# Allegro board 2019-09-02.brd
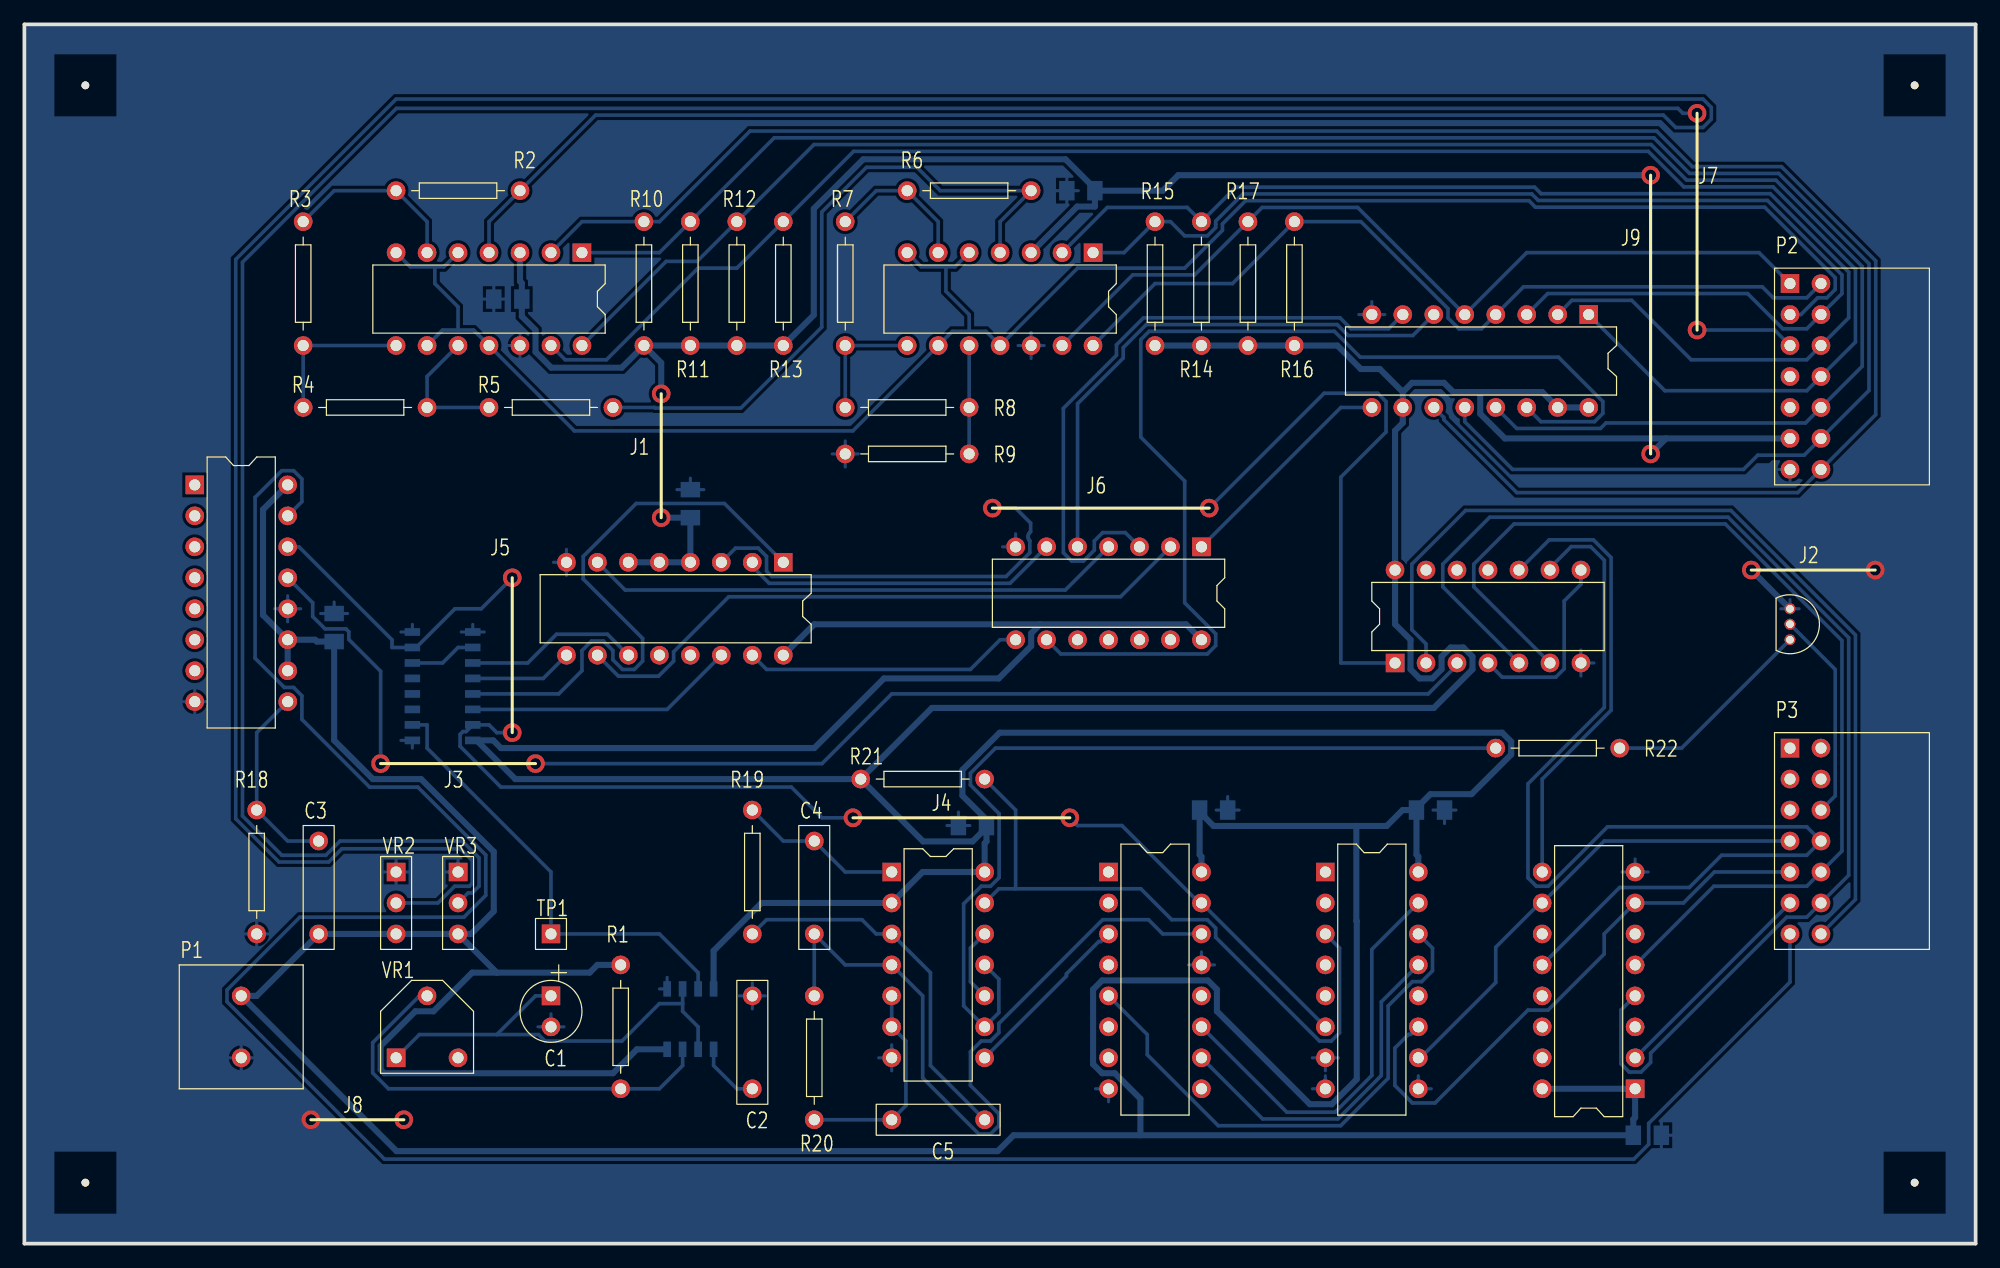
[diagram p0: board, top side]
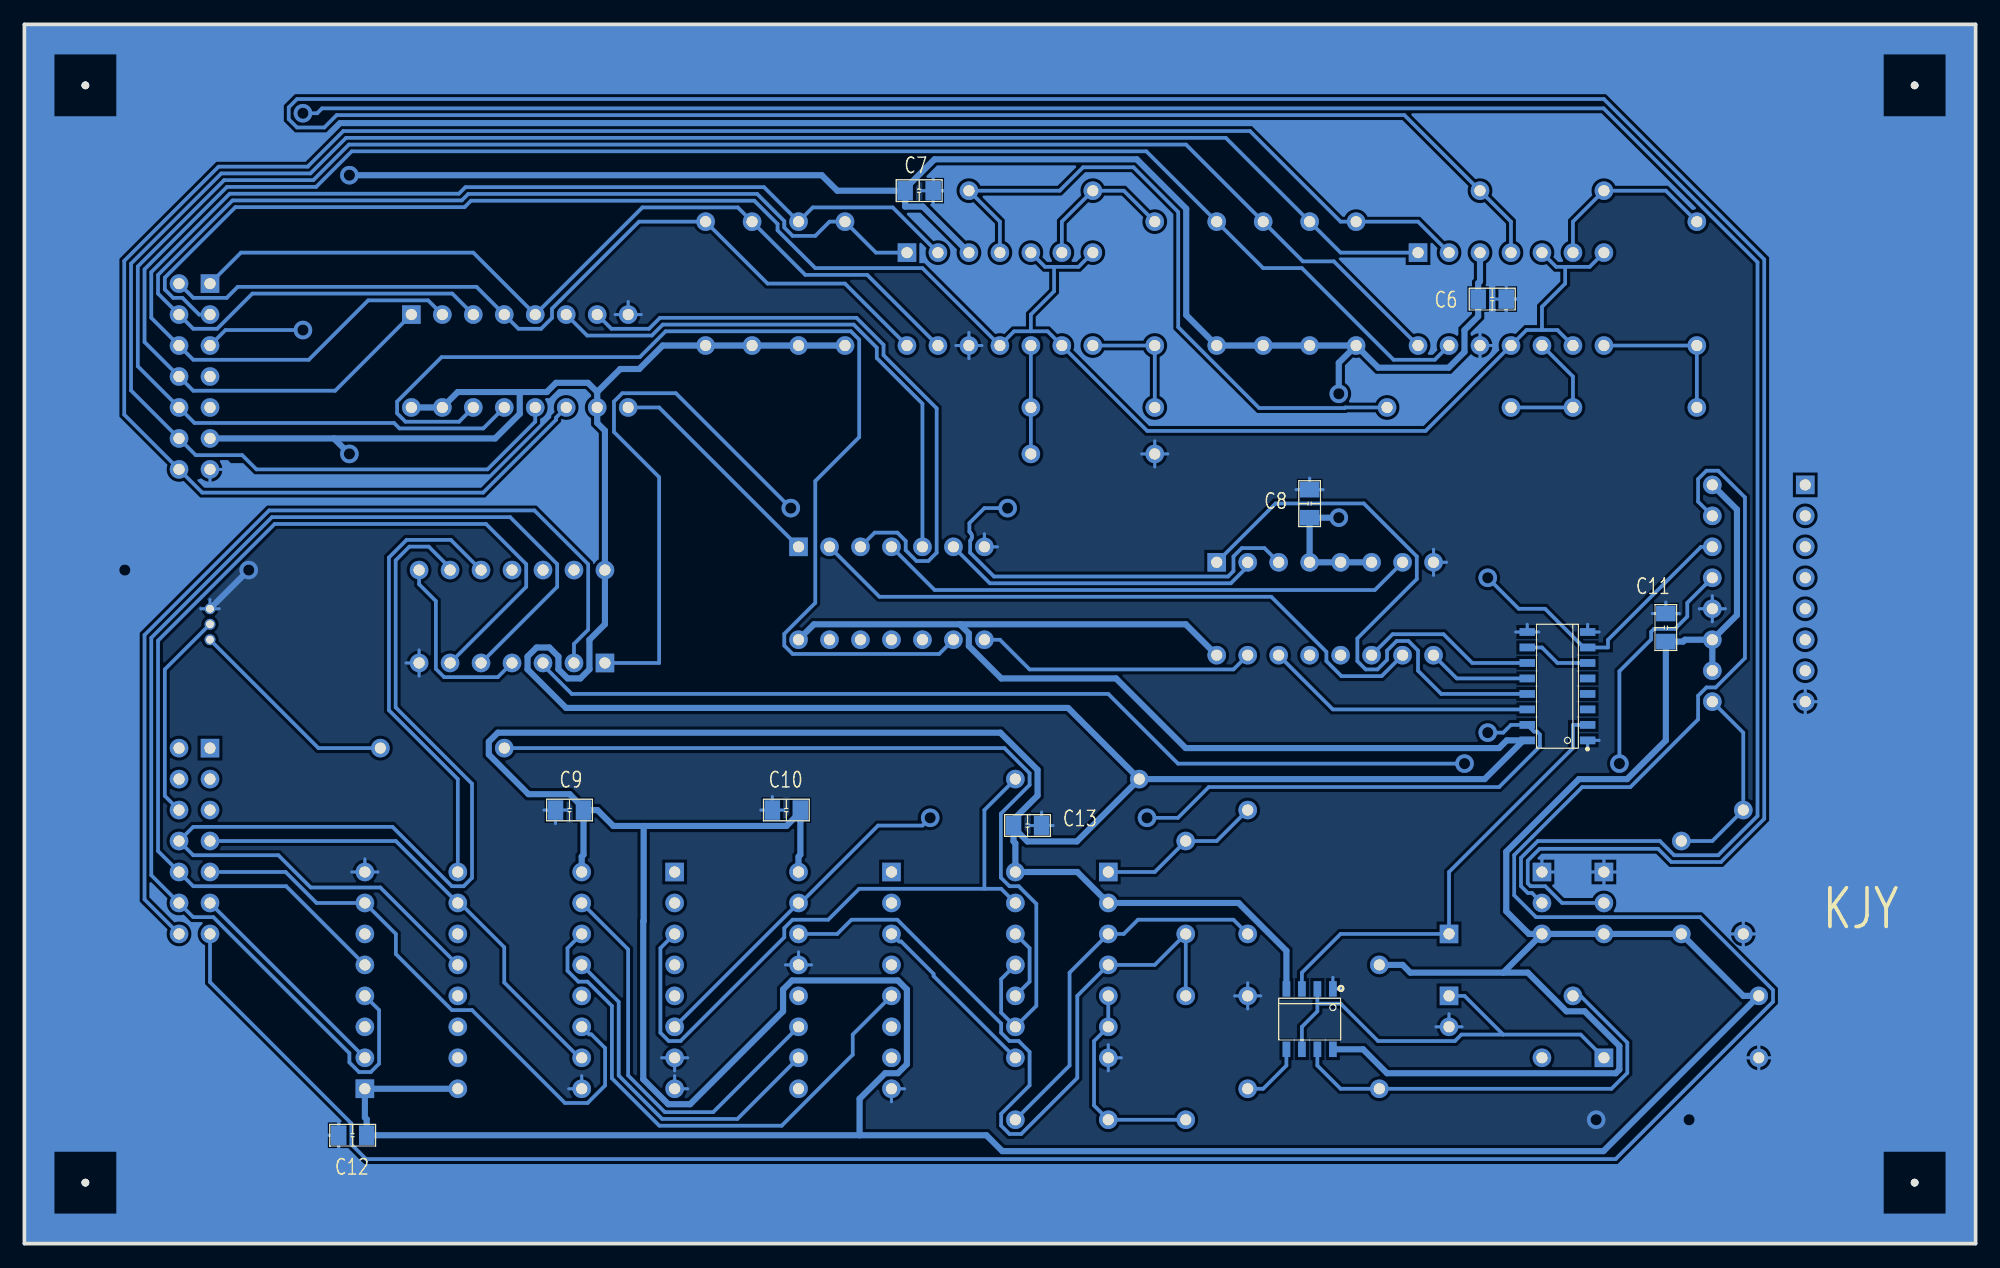
[diagram p1: board, bottom side, seen from below]

Outline 160 x 100 mm; copper layers: TOP, BOTTOM. Coordinates in mm from the lower left corner of the outline.
Outline path: 0,100 0,0 160,0 160,100 0,100

## Design rules (mm)
nets with their own width: min track width 0.5; nets +5V GND

## Placement (name value [footprint] x y rotation side)
C1  10uF  [CAP196]  43.18 20.32 180 top
C2  0.1uF  [CAP300]  59.69 12.7 90 top
C3  0.1uF  [CAP300]  24.13 25.4 90 top
C4  0.1uF  [CAP300]  64.77 33.02 270 top
C5  0.1uF  [CAP300]  78.74 10.16 180 top
C6  0.1uF  [SMDCAP]  40.64 77.47 180 bottom
C7  0.1uF  [SMDCAP]  87.63 86.36 180 bottom
C8  0.1uF  [SMDCAP]  54.61 59.69 90 bottom
C9  0.1uF  [SMDCAP]  114.3 35.56 0 bottom
C10  0.1uF  [SMDCAP]  96.52 35.56 0 bottom
C11  0.1uF  [SMDCAP]  25.4 49.53 90 bottom
C12  0.1uF  [SMDCAP]  132.08 8.89 0 bottom
C13  0.1uF  [SMDCAP]  78.74 34.29 180 bottom
J1  -  [3]  52.22 59.54 270 bottom
J2  -  [3]  141.6 55.24 180 bottom
J3  -  [4]  41.91 39.37 0 bottom
J4  -  [6]  85.72 34.92 0 bottom
J5  -  [4]  40.01 41.91 270 bottom
J6  -  [6]  97.16 60.33 0 bottom
J7  -  [6]  137.16 92.71 90 bottom
J8  -  [2]  31.11 10.16 0 bottom
J9  -  [8]  133.35 87.63 90 bottom
NOREF  -  [unnamed]  155 5 0 top
NOREF#2  -  [unnamed]  155 95 0 top
NOREF#3  -  [unnamed]  5 5 0 top
NOREF#4  -  [unnamed]  5 95 0 top
P1  CON2  [2P]  17.78 20.32 0 top
P2  CON14  [JUMPER14]  144.78 78.74 270 top
P3  CON14  [JUMPER14]  144.78 40.64 270 top
Q1  2SC1815  [TO92]  144.78 52.07 0 top
R1  10K  [RES400]  48.9 22.86 270 top
R2  10K  [RES400]  40.64 86.36 180 top
R3  10K  [RES400]  22.86 83.82 270 top
R4  10K  [RES400]  22.86 68.58 0 top
R5  10K  [RES400]  38.1 68.58 0 top
R6  10K  [RES400]  82.55 86.36 180 top
R7  10K  [RES400]  67.31 83.82 270 top
R8  10K  [RES400]  67.31 68.58 0 top
R9  10K  [RES400]  77.47 64.77 180 top
R10  10K  [RES400]  50.8 73.66 90 top
R11  10K  [RES400]  54.61 73.66 90 top
R12  10K  [RES400]  58.42 73.66 90 top
R13  10K  [RES400]  62.23 73.66 90 top
R14  10K  [RES400]  96.52 73.66 90 top
R15  10K  [RES400]  92.71 73.66 90 top
R16  10K  [RES400]  104.14 73.66 90 top
R17  10K  [RES400]  100.33 73.66 90 top
R18  10K  [RES400]  19.05 35.56 270 top
R19  10K  [RES400]  59.69 35.56 270 top
R20  10K  [RES400]  64.77 20.32 270 top
R21  10K  [RES400]  68.58 38.1 0 top
R22  10K  [RES400]  130.81 40.64 180 top
TP1  TP  [JUMPER1]  43.18 25.4 0 top
U1  NE555  [SOIC8]  54.61 18.41 270 bottom
U2  LM339  [DIP14_3]  45.72 81.28 270 top
U3  LM339  [DIP14_3]  87.63 81.28 270 top
U4  40147  [DIP16_3]  128.27 76.2 270 top
U5  4069  [DIP14_3]  96.52 57.15 270 top
U6  4518  [SOIC16]  34.29 45.72 0 bottom
U7  4585  [DIP16_3]  62.23 55.88 270 top
U8  4027  [DIP16_3]  13.97 62.23 0 top
U9  4071  [DIP14_3]  112.39 47.62 90 top
U10  4001  [DIP14_3]  71.12 30.48 0 top
U11  4017  [DIP16_3]  88.9 30.48 0 top
U12  4051  [DIP16_3]  106.68 30.48 0 top
U13  4175  [DIP16_3]  132.08 12.7 180 top
VR1  1M  [VR1]  30.48 15.24 0 top
VR2  10K  [VR2]  30.48 27.94 0 top
VR3  10K  [VR2]  35.56 27.94 0 top

## Library data of the parts
C1 = Cap POL
C2-C5 = Cap NP
C6-C13 = Cap TEXT
J1-J9 = JUMPER
P1 = CON2
P2 P3 = CON14
Q1 = 2SC1815
R1-R22 = resistor
TP1 = TP
U1 = NE555: Tolerance: ***; User Part Number: ***
U2 U3 = LM339: Tolerance: ***; User Part Number: ***
U4 = 40147: Tolerance: ***; User Part Number: ***
U5 = 4069: Tolerance: ***; User Part Number: ***
U6 = 4518: Tolerance: ***; User Part Number: ***
U7 = 4585: Tolerance: ***; User Part Number: ***
U8 = 4027: Tolerance: ***; User Part Number: ***
U9 = 4071: Tolerance: ***; User Part Number: ***
U10 = 4001: Tolerance: ***; User Part Number: ***
U11 = 4017: Tolerance: ***; User Part Number: ***
U12 = 4051: Tolerance: ***; User Part Number: ***
U13 = 4175: Tolerance: ***; User Part Number: ***
VR1 = VR1
VR2 VR3 = VR2

## Footprints (pads in the part's own frame, mm; a bottom-side part is the same pattern mirrored in y, then rotated)
2P
  round 1.524 hole 0.914: 1(0,0) 2(0,-5.08)
CAP196
  rect 1.524x1.524 hole 0.914: 1(0,0)
  round 1.524 hole 0.914: 2(0,2.54)
CAP300
  round 1.524 hole 0.914: 1(0,0) 2(7.62,0)
DIP14_3
  rect 1.524x1.524 hole 0.914: 1(0,0)
  round 1.524 hole 0.914: 2(0,-2.54) 3(0,-5.08) 4(0,-7.62) 5(0,-10.16) 6(0,-12.7) 7(0,-15.24) 8(7.62,-15.24) 9(7.62,-12.7) 10(7.62,-10.16) 11(7.62,-7.62) 12(7.62,-5.08) 13(7.62,-2.54) 14(7.62,0)
DIP16_3
  rect 1.524x1.524 hole 0.914: 1(0,0)
  round 1.524 hole 0.914: 2(0,-2.54) 3(0,-5.08) 4(0,-7.62) 5(0,-10.16) 6(0,-12.7) 7(0,-15.24) 8(0,-17.78) 9(7.62,-17.78) 10(7.62,-15.24) 11(7.62,-12.7) 12(7.62,-10.16) 13(7.62,-7.62) 14(7.62,-5.08) 15(7.62,-2.54) 16(7.62,0)
JUMPER1
  rect 1.524x1.524 hole 0.914: 1(0,0)
JUMPER14
  rect 1.524x1.524 hole 0.914: 1(0,0)
  round 1.524 hole 0.914: 2(0,2.54) 3(2.54,0) 4(2.54,2.54) 5(5.08,0) 6(5.08,2.54) 7(7.62,0) 8(7.62,2.54) 9(10.16,0) 10(10.16,2.54) 11(12.7,0) 12(12.7,2.54) 13(15.24,0) 14(15.24,2.54)
RES400
  round 1.524 hole 0.914: 1(0,0) 2(10.16,0)
SMDCAP
  rect 1.27x1.6 smd: 1(-0.15,0) 2(2.15,0)
SOIC8
  rect 1.27x0.635 smd: 1(-2.476,1.905) 2(-2.476,0.635) 3(-2.476,-0.635) 4(-2.476,-1.905) 5(2.476,-1.905) 6(2.476,-0.635) 7(2.476,0.635) 8(2.476,1.905)
SOIC16
  rect 1.27x0.635 smd: 1(-2.476,4.445) 2(-2.476,3.175) 3(-2.476,1.905) 4(-2.476,0.635) 5(-2.476,-0.635) 6(-2.476,-1.905) 7(-2.476,-3.175) 8(-2.476,-4.445) 9(2.476,-4.445) 10(2.476,-3.175) 11(2.476,-1.905) 12(2.476,-0.635) 13(2.476,0.635) 14(2.476,1.905) 15(2.476,3.175) 16(2.476,4.445)
TO92
  round 0.889 hole 0.635: 1(0,0) 2(0,-1.27) 3(0,-2.54)
unnamed
  round 0.635 hole 3 unplated: (0,0)
VR1
  rect 1.524x1.524 hole 0.914: 1(0,0)
  round 1.524 hole 0.914: 2(2.54,5.08) 3(5.08,0)
VR2
  round 1.524 hole 0.914: 1(0,-2.54) 2(0,0)
  rect 1.524x1.524 hole 0.914: 3(0,2.54)

## Nets
+5V: C3.1 C6.1 C7.1 C8.1 C9.1 C10.1 C11.1 C12.1 C13.1 P1.1 P2.11 R1.1 R10.1 R11.1 R12.1 R13.1 R14.1 R15.1 R16.1 R17.1 R21.1 U1.4(RST) U1.8(VCC) U2.3 U3.3 U4.10(I\9\) U4.15(I\0\) U4.16(VCC) U5.14 U6.16 U7.4(A>BIN) U7.5(A<BIN) U7.6(A=BIN) U7.16(VCC) U8.10(J) U8.11(K) U8.16 U9.14 U10.2(I1) U10.14 U11.16(VCC) U12.16(VCC) U13.1(R\S\T\) U13.16(VCC) VR2.1(A) VR3.1(A)
GND: C1.2 C2.2 C6.2 C7.2 C8.2 C9.2 C10.2 C11.2 C12.2 C13.2 P1.2 P2.13 Q1.1(B) R9.2 R18.2 U1.1(GND) U2.12 U3.12 U4.8(GND) U5.7 U6.1(CLK) U6.8 U6.9(CLK) U7.8(GND) U8.8 U8.12(RST) U9.7 U10.7 U11.8(GND) U11.13(C\K\E\N\) U12.7(VEE) U12.8(GND) U12.9(C) U13.8(GND) VR2.3(WIPER) VR3.3(WIPER)
AD0: P2.14 R10.2 U2.2(OUT) U4.11(I\1\)
AD1: P2.12 R11.2 U2.1(OUT) U4.12(I\2\)
AD2: P2.10 R12.2 U2.14(OUT) U4.13(I\3\)
AD3: P2.8 R13.2 U2.13(OUT) U4.1(I\4\)
AD4: P2.6 R14.2 U3.2(OUT) U4.2(I\5\)
AD5: P2.4 R15.2 U3.1(OUT) U4.3(I\6\)
AD6: P2.2 R16.2 U3.14(OUT) U4.4(I\7\)
AD7: P2.1 R17.2 U3.13(OUT) U4.5(I\8\)
CLK: TP1.1 U1.3(OUT) U6.2(EN)
MOTOR-GND: P3.6 Q1.2(C)
MR: U6.7(CLR) U6.15(CLR) U8.14(Q\) U11.15(RST) U12.6(E\N\)
MR2: P3.13 U8.15(Q)
SW1: P3.14 U9.2(I1)
SW2: P3.12 U9.5(I0) U13.4(D0)
SW3: P3.10 U9.6(I1) U13.5(D1)
SW4: P3.8 U9.9(I1) U13.12(D2)
SWLED1: P3.11 U13.2(Q0)
SWLED2: P3.9 U12.11(A) U13.7(Q1)
SWLED3: P3.7 U12.10(B) U13.10(Q2)
VR3: P2.5 VR3.2(B)
VR-LED: P2.3 U2.5(+IN) U2.7(+IN) U2.9(+IN) U2.11(+IN) U3.5(+IN) U3.7(+IN) U3.9(+IN) U3.11(+IN)
N02154: R2.2 R3.1 U2.6(-IN)
N02158: R2.1 U2.4(-IN) VR2.2(B)
N02195: R3.2 R4.1 U2.8(-IN)
N02258: R4.2 R5.1 U2.10(-IN)
N02321: R5.2 R6.1 U3.4(-IN)
N02384: R6.2 R7.1 U3.6(-IN)
N02447: R7.2 R8.1 U3.8(-IN)
N02510: R8.2 R9.1 U3.10(-IN)
N03272: U4.9(A\) U5.1(I)
N03276: U4.7(B\) U5.3(I)
N03288: U4.6(C\) U5.5(I)
N03300: U4.14(D\) U5.9(I)
N03312: U5.8(O) U7.15(A3)
N03319: U5.6(O) U7.2(A2)
N03331: U5.4(O) U7.7(A1)
N03346: U5.2(O) U7.10(A0)
N03382: U6.11(Q0) U7.11(B0)
N03384: U6.12(Q1) U7.9(B1)
N03386: U6.13(Q2) U7.1(B2)
N03388: U6.14(Q3) U7.14(B3)
N03412: U6.6(Q3) U6.10(EN)
N05589: U7.3(A=BOUT) U9.1(I0)
N05720: R1.2 U1.7(DISC) VR1.2
N05724: C1.1 U1.2(TRIG) U1.6(THR) VR1.1
N05765: C2.1 U1.5(CV)
N05780: U8.13(CLK) U9.3(O)
N05813: C3.2 R18.1 U8.9(SET)
N09092: Q1.3(E) R22.1
N09137: C5.1 R19.2 U10.3(O)
N09147: C5.2 R20.2 U10.5(I0) U10.6(I1)
N09232: C4.1 R19.1 U10.1(I0)
N09296: C4.2 R20.1 U10.4(O) U11.14(CLK)
N09410: U10.8(I0) U11.3(0)
N09434: U11.11(9) U12.15(X2)
N09465: U11.5(6) U12.14(X1)
N09487: U11.10(4) U12.13(X0)
N09499: R21.2 U10.13(I1) U12.3(X)
N09532: U10.10(O) U10.12(I0)
N09550: R22.2 U10.9(I1) U10.11(O)
N09947: U9.4(O) U9.8(I0)
N09972: U9.10(O) U13.9(CLK)

Pads without a net: P2 7 9; P3 1 2 3 4 5; U5 10 11 12 13; U6 3 4 5; U7 12 13; U8 1 2 3 4 5 6 7; U9 11 12 13; U11 1 2 4 6 7 9 12; U12 1 2 4 5 12; U13 3 6 11 13 14 15; VR1 3

## Via types
v1: diameter 1.524, hole 0.914, TOP to BOTTOM, 18 vias

## Routing (per net, layer and track width the routed paths; a pad name or vN(x,y) marks a point on that pad's centre or on a via; arc(x,y) is an arc through that point)
+5V: length 871.1
  BOTTOM w0.5: 119.38,69.85 124.46,69.85 U4.15 U4.16 ; 119.38,69.85 117.16,69.85 116.41,70.6 113.78,70.6 113.03,69.85 ; 119.38,69.85 119.38,68.06 121.4,66.04 134.62,66.04 ; 113.03,69.85 111.14,71.74 109.58,71.74 107.66,73.66 R16.1 R17.1 R14.1 R15.1 ; 113.03,69.85 U4.10 113.03,67.31 112.39,66.68 U9.14 112.39,50.8 113.67,49.53 113.67,47.1 114.41,46.36 115.46,46.36 116.21,47.11 116.21,48.15 116.95,48.89 118,48.89 118.74,48.15 118.74,47.1 115.58,43.94 74.42,43.94 R21.1 ; 37.08,41.27 40.26,38.1 R21.1 ; 37.08,41.27 38.45,41.27 39.08,40.64 64.77,40.64 70.48,46.35 79.9,46.35 82.55,49.01 82.55,50.05 83.3,50.8 ; 37.08,41.27 U6.16 ; R21.1 73.69,32.99 77.75,32.99 78.89,34.12 ; C7.1 87.78,85.06 86.33,85.06 U3.3 ; C7.1 87.78,86.53 85.37,88.93 68.78,88.93 64.73,84.88 64.73,76.16 R13.1 R12.1 R11.1 R10.1 ; C7.1 93.34,86.36 94.61,87.63 v1(133.35,87.63) ; U1.8 50.23,15.94 48.26,13.97 29.51,13.97 29.21,14.27 29.21,16.21 32.06,19.05 33.55,19.05 36.72,22.23 38.73,22.23 ; C10.1 96.37,35.4 ; 96.37,35.4 96.37,31.9 96.52,31.75 U11.16 ; 96.37,35.4 97.51,34.26 109.22,34.26 ; 83.3,50.8 64.77,50.8 U7.16 ; 83.3,50.8 95.25,50.8 U5.14 ; 109.22,34.26 109.22,26.47 109.25,26.43 109.25,13.48 107.2,11.43 105.41,11.43 97.79,19.05 97.79,20.84 97.05,21.59 88.38,21.59 87.63,20.84 87.63,14.71 88.38,13.97 89.42,13.97 91.51,11.88 91.51,8.89 ; 109.22,34.26 111.71,34.26 113.01,35.56 C9.1 ; U1.4 56.52,24.02 60.44,27.94 U10.2 73.66,30.48 U10.14 78.74,32.84 78.89,32.99 78.89,34.12 ; 78.89,34.12 C13.1 78.89,34.77 76.92,36.74 76.92,38.85 79.97,41.91 121.17,41.91 121.92,41.16 121.92,40.12 118.67,36.86 115.29,36.86 114.15,35.73 C9.1 ; R1.1 46.99,22.86 46.35,22.23 38.73,22.23 ; U7.6 U7.5 U7.4 C8.1 v1(52.22,59.54) ; 91.51,8.89 81.11,8.89 79.81,7.59 30.51,7.59 P1.1 19.05,20.32 C3.1 VR2.1 VR3.1 ; 91.51,8.89 C12.1 131.93,10.19 132.08,10.34 U13.1 U13.16 ; VR3.1 36.63,25.4 38.49,27.26 38.49,32.14 32.53,38.1 28.57,38.1 25.4,41.27 C11.1 23.98,49.38 23.83,49.53 U8.11 ; VR3.1 38.73,22.23 ; R10.1 52.22,72.24 v1(52.22,69.7) ; R10.1 48.98,71.84 43.21,71.84 41.91,73.14 41.91,74.93 40.79,76.05 C6.1 40.79,78.77 40.64,78.92 U2.3 ; C9.1 114.15,31.9 114.3,31.75 U12.16 ; 134.62,66.04 P2.11 ; 134.62,66.04 v1(133.35,64.77) ; U8.11 U8.10 ; U8.11 19.57,51.55 19.57,60.21 U8.16
GND: length 116.5
  BOTTOM w0.254: 31.81,50.79 U6.8 30.87,50.16 ; C12.2 135.17,8.89 ; C12.2 134.23,10 ; C12.2 134.23,7.78 ; 88.9,11.63 U11.8 87.83,12.7 ; 105.61,12.7 U12.8 106.68,13.77 ; 109.42,76.2 U4.8 ; U4.8 111.56,76.2 ; U4.8 110.49,77.27 ; 40.64,72.59 U2.12 ; U2.12 39.57,73.66 ; U2.12 40.64,74.73 ; 20.52,52.07 U8.12 ; U8.12 21.59,53.14 ; U8.12 22.66,52.07 ; U8.12 21.59,51 ; 115.51,35.56 C9.2 ; C9.2 117.39,35.56 ; C9.2 116.45,34.45 ; 30.87,41.27 U6.1 31.81,40.65 ; 66.24,64.77 R9.2 ; R9.2 67.31,63.7 ; R9.2 67.31,65.84 ; R9.2 68.38,64.77 ; 143.71,63.5 P2.13 144.78,62.43 ; C6.2 39.43,77.47 ; C6.2 37.55,77.47 ; C6.2 38.49,76.36 ; C6.2 38.49,78.58 ; 35.82,50.16 U6.9 ; U6.9 37.71,50.16 ; U6.9 36.77,50.79 ; 70.05,15.24 U10.7 ; U10.7 71.12,14.17 ; U10.7 71.12,16.31 ; C8.2 54.61,62.78 ; C8.2 55.72,61.84 ; C8.2 53.5,61.84 ; 43.38,55.88 U7.8 ; U7.8 44.45,54.81 ; U7.8 44.45,56.95 ; 85.48,85.25 C7.2 ; C7.2 86.42,86.36 ; C7.2 85.48,87.47 ; C7.2 84.54,86.36 ; 58.62,20.32 C2.2 ; C2.2 60.76,20.32 ; C2.2 59.69,21.39 ; C2.2 59.69,19.25 ; 81.48,73.66 U3.12 ; U3.12 83.62,73.66 ; U3.12 82.55,74.73 ; U3.12 82.55,72.59 ; 127.64,46.56 127.64,47.62 ; 127.64,47.62 128.7,47.62 ; 127.64,47.62 127.64,48.69 ; P1.2 17.78,16.31 ; P1.2 18.85,15.24 ; P1.2 17.78,14.17 ; P1.2 16.71,15.24 ; 75.65,34.29 C13.2 ; C13.2 76.59,35.4 ; C13.2 77.53,34.29 ; R18.2 19.05,26.47 ; R18.2 20.12,25.4 ; R18.2 19.05,24.33 ; R18.2 17.98,25.4 ; 81.28,58.22 U5.7 80.21,57.15 ; C10.2 99.61,35.56 ; C10.2 98.67,36.67 ; C10.2 97.73,35.56 ; U13.8 133.15,30.48 ; U13.8 131.01,30.48 ; U13.8 132.08,31.55 ; 52.08,20.89 U1.1 52.7,21.83 ; U12.7 107.75,15.24 ; U12.7 106.68,14.17 ; U12.7 105.61,15.24 ; U8.8 15.04,44.45 ; U8.8 12.9,44.45 ; U8.8 13.97,43.38 ; U8.8 13.97,45.52 ; 115.37,12.7 U12.9 114.3,13.77 ; U11.13 97.59,22.86 ; U11.13 96.52,23.93 ; U11.13 95.45,22.86 ; C11.2 26.51,51.68 ; C11.2 24.29,51.68 ; C11.2 25.4,52.62 ; 42.11,17.78 C1.2 ; C1.2 43.18,18.85 ; C1.2 44.25,17.78 ; 34.49,30.48 VR3.3 35.56,31.55 ; VR2.3 31.55,30.48 ; VR2.3 30.48,31.55 ; VR2.3 30.48,29.41 ; VR2.3 29.41,30.48 ; 144.03,52.07 Q1.1 ; Q1.1 144.78,52.82 ; Q1.1 145.53,52.07
  BOTTOM w0.5: Q1.1 v1(141.6,55.24)
  vias: v1(23.5,10.16) v1(31.11,10.16) v1(151.76,55.24)
AD0: length 171.7
  BOTTOM w0.3: U2.2 45.72,83.82 R10.2 52.07,83.82 59.5,91.25 133.85,91.25 136.77,88.33 144.08,88.33 151.81,80.6 151.81,67.99 P2.14 145.41,61.59 122.38,61.59 116.39,67.58 116.39,67.75 U4.11
AD1: length 162.7
  BOTTOM w0.3: U2.1 52.07,81.28 R11.2 61.49,90.7 133.62,90.7 136.54,87.78 143.85,87.78 151.26,80.37 151.26,69.98 P2.12 145.95,64.67 142.14,64.67 140.97,63.5 122.02,63.5 118.11,67.41 U4.12
AD2: length 157
  BOTTOM w0.3: U2.14 52.62,80.56 55.16,80.56 R12.2 64.74,90.14 133.39,90.14 136.31,87.22 143.62,87.22 150.7,80.14 150.7,71.96 P2.10 146.05,67.31 129.69,67.31 129.24,66.86 122.37,66.86 U4.13
AD3: length 150.6
  BOTTOM w0.3: U2.13 44.35,72.49 47.73,72.49 55.24,80.01 58.42,80.01 R13.2 68,89.59 133.16,89.59 136.08,86.67 143.39,86.67 150.15,79.91 150.15,73.95 P2.8 146.15,69.95 134.52,69.95 U4.1
AD4: length 102.1
  BOTTOM w0.3: U3.2 88.8,84.99 95.35,84.99 R14.2 99.35,86.65 123.83,86.65 124.37,86.11 143.16,86.11 149.59,79.68 149.59,75.93 P2.6 146.15,72.49 136.68,72.49 131.81,77.37 126.9,77.37 U4.2
AD5: length 97.9
  BOTTOM w0.3: U4.3 124.91,77.92 141.3,77.92 144.19,75.03 146.15,75.03 P2.4 149.04,77.92 149.04,79.45 142.93,85.56 124.14,85.56 123.6,86.09 99.92,86.09 97.69,83.86 97.69,83.61 97.69,83.61 97.69,83.34 97,82.65 95.15,82.65 93.98,83.82 R15.2 90.17,81.28 U3.1
AD6: length 70.3
  BOTTOM w0.3: P2.2 146.15,77.57 143.41,77.57 142.51,78.47 122.92,78.47 U4.4 119.48,75.03 117.63,75.03 116.74,75.92 116.74,76.68 116.05,77.37 109.6,83.82 R16.2 99.06,78.74 92.71,78.74 U3.14
AD7: length 71.2
  BOTTOM w0.3: P2.1 142.24,81.28 123.19,81.28 U4.5 109.32,84.99 101.5,84.99 R17.2 95.97,79.46 90.89,79.46 U3.13
CLK: length 37.3
  BOTTOM w0.3: U6.2 33.02,42.55 33.02,40.64 43.18,30.48 TP1.1 52.07,25.4 55.24,22.23 U1.3
MOTOR-GND: length 17.3
  BOTTOM w0.3: P3.6 148.49,36.73 148.49,47.09 Q1.2
MR: length 93.1
  BOTTOM w0.3: v1(40.01,54.61) 37.47,52.07 35.31,52.07 32.13,48.9 30.14,48.9 30.14,49.52 22.52,57.15 U8.14 ; v1(67.94,34.92) 65.41,34.92 62.88,37.45 39.07,37.45 35.73,40.79 35.73,41.76 35.96,42 36.22,42 U6.15 38.1,42.55 38.73,41.91 v1(40.01,41.91) ; v1(85.72,34.92) 86.36,34.29 89.99,34.29 96.34,27.94 U11.15 U12.6
MR2: length 221.7
  BOTTOM w0.3: P3.13 144.78,21.45 133.19,9.86 133.19,8.14 131.98,6.93 29.52,6.93 16.61,19.84 16.61,20.8 22.59,26.77 36.04,26.77 37.83,28.57 37.83,31.87 36.34,33.36 32.26,37.45 28.3,37.45 22.76,42.99 22.76,44.93 22.07,45.62 21.32,45.62 18.92,48.02 18.92,61.2 21.11,63.4 22.07,63.4 22.76,62.71 22.76,60.86 U8.15
SW1: length 76.7
  BOTTOM w0.3: P3.14 150.15,28.23 150.15,49.92 139.93,60.13 118.18,60.13 113.77,55.73 113.77,50.35 114.94,49.19 U9.2
SW2: length 101.3
  BOTTOM w0.3: U13.4 130.91,19.15 130.91,14.76 131.6,14.07 132.56,14.07 133.35,14.86 133.35,15.62 144.5,26.77 146.15,26.77 P3.12 149.59,30.21 149.59,49.69 139.7,59.58 120.16,59.58 116.31,55.73 116.31,53.87 122.56,47.62
SW3: length 84.3
  BOTTOM w0.3: U9.6 118.85,53.87 118.85,55.73 122.15,59.03 139.47,59.03 149.04,49.46 149.04,32.2 P3.10 146.15,29.31 138.53,29.31 U13.5
SW4: length 88.3
  BOTTOM w0.3: U9.9 125.09,55.42 126.84,57.16 128.43,57.16 129.56,56.04 129.56,43.98 123.29,37.72 123.29,30 123.98,29.31 124.94,29.31 129.82,34.19 146.15,34.19 P3.8 146.15,31.85 139.17,31.85 136.53,29.21 130.81,29.21 U13.12
SWLED1: length 18
  BOTTOM w0.3: P3.11 U13.2
SWLED2: length 47.5
  BOTTOM w0.3: U12.11 113.68,17.16 113.5,17.16 112.38,16.04 112.38,12.97 113.82,11.53 115.67,11.53 123.29,19.15 124.94,19.15 129.54,23.75 129.54,25.4 U13.7 136.04,27.94 138.58,30.48 P3.9
SWLED3: length 39.5
  BOTTOM w0.3: P3.7 129.54,33.02 U13.10 124.28,27.94 120.65,24.31 120.65,21.41 114.48,15.24 U12.10
VR3: length 204.6
  BOTTOM w0.3: VR3.2 36.38,28.76 36.72,28.76 37.28,29.32 37.28,31.64 35.9,33.02 25.89,33.02 24.72,31.85 21.11,31.85 17.88,35.08 17.88,80.49 30.5,93.11 135.59,93.11 135.99,92.71 v1(137.16,92.71) ; v1(137.16,74.93) 143.51,74.93 P2.5
VR-LED: length 160.8
  BOTTOM w0.3: U2.5 34.39,80.11 33.66,80.11 ; 33.66,80.11 31.65,80.11 U2.7 ; 33.66,80.11 33.66,78.74 35.56,76.83 35.56,74.93 ; P2.3 145.67,76.2 147.04,77.57 147.8,77.57 148.49,78.26 148.49,79.22 142.7,85.01 123.91,85.01 123.37,85.54 100.14,85.54 98.24,83.64 98.24,83.11 95.14,80.01 86.36,80.01 U3.11 78.84,74.83 77.47,74.83 ; U2.9 34.29,74.93 35.56,74.93 ; U3.7 73.56,80.11 75.56,80.11 ; 75.56,80.11 76.3,80.11 U3.5 ; 75.56,80.11 75.56,78.11 77.47,76.2 77.47,74.83 ; 77.47,74.83 76.1,74.83 U3.9 67.93,66.66 45.1,66.66 U2.11 36.83,74.93 35.56,74.93
N02154: length 14.8
  BOTTOM w0.3: U2.6 33.02,83.82 R2.2 25.4,86.36 R3.1
N02158: length 311.1
  BOTTOM w0.3: U2.4 38.1,83.82 R2.1 46.84,92.56 134.39,92.56 135.41,91.54 137.64,91.54 138.33,92.23 138.33,93.19 137.64,93.88 30.48,93.88 17.33,80.72 17.33,34.85 20.88,31.3 24.95,31.3 26.04,32.38 35.75,32.38 36.73,31.41 36.73,29.55 36.49,29.31 35.28,29.31 33.91,27.94 VR2.2
N02195: length 12.7
  BOTTOM w0.3: R4.1 R3.2 U2.8
N02258: length 11.2
  BOTTOM w0.3: R5.1 R4.2 33.02,71.12 U2.10
N02321: length 54.9
  BOTTOM w0.3: R5.2 51.69,68.58 51.74,68.53 58.75,68.53 65.39,75.17 65.39,84.61 69.05,88.28 73.19,88.28 75.11,86.36 R6.1 80.01,83.82 U3.4
N02384: length 12.3
  BOTTOM w0.3: R7.1 69.85,86.36 R6.2 74.93,83.82 U3.6
N02447: length 10.2
  BOTTOM w0.3: R8.1 R7.2 U3.8
N02510: length 8.9
  BOTTOM w0.3: R9.1 R8.2 U3.10
N03272: length 18.7
  BOTTOM w0.3: U4.9 107.95,68.58 U5.1
N03276: length 52.5
  BOTTOM w0.3: U4.7 111.86,75.03 108.78,75.03 107.88,75.93 91.77,75.93 89.55,73.72 89.55,72.86 85.19,68.51 85.19,56.67 85.88,55.98 86.84,55.98 87.73,56.88 87.73,57.63 88.42,58.32 90.27,58.32 U5.3
N03288: length 45.2
  BOTTOM w0.3: U5.5 86.36,68.89 90.1,72.63 90.1,73.49 92,75.38 107.65,75.38 108.55,74.48 113.85,74.48 U4.6
N03300: length 90.8
  BOTTOM w0.3: U5.9 84.99,48.36 97,48.36 97.69,49.05 97.69,50.01 95.15,52.55 95.15,62.54 91.54,66.14 91.54,74.14 92.23,74.83 107.42,74.83 109.54,72.71 125.79,72.71 129.44,69.06 129.44,68.1 128.75,67.41 124.36,67.41 U4.14
N03312: length 23.1
  BOTTOM w0.3: U5.8 80.01,49.53 77.57,47.09 60.86,47.09 U7.15
N03319: length 26.3
  BOTTOM w0.3: U7.2 59.69,55.54 61.07,54.16 80.83,54.16 U5.6
N03331: length 44.3
  BOTTOM w0.3: U7.7 49.26,53.61 85.36,53.61 U5.4
N03346: length 52.5
  BOTTOM w0.3: U7.10 48.71,46.54 52,46.54 53.24,47.78 53.24,48.53 57.75,53.05 89.88,53.05 U5.2
N03382: length 14.5
  BOTTOM w0.3: U7.11 47.81,49.98 43.63,49.98 41.27,47.62 U6.11
N03384: length 8.5
  BOTTOM w0.3: U6.12 42.55,46.35 U7.9
N03386: length 49.2
  BOTTOM w0.3: U7.1 57.4,60.71 50.17,60.71 45.82,56.36 45.82,54.51 50.7,49.63 50.7,47.78 50.01,47.09 49.05,47.09 48.26,47.88 48.26,48.64 47.47,49.43 46.51,49.43 45.72,48.64 45.72,46.99 43.81,45.09 U6.13
N03388: length 22.2
  BOTTOM w0.3: U7.14 52.7,43.81 U6.14
N03412: length 5.5
  BOTTOM w0.3: 36.77,48.9 35.56,48.9 34.29,47.62 U6.6
N05589: length 80.5
  BOTTOM w0.3: U7.3 58.32,57.05 60.17,57.05 60.86,56.36 60.86,55.16 61.3,54.71 80.49,54.71 82.45,56.67 82.45,57.64 82.41,57.68 82.35,57.77 82.32,57.86 82.31,57.96 82.31,58.06 82.33,58.16 82.38,58.25 82.44,58.33 82.51,58.39 82.51,59.09 81.28,60.33 v1(79.38,60.33) ; v1(97.16,60.33) 106.58,69.75 110.97,69.75 111.66,69.06 111.66,66.57 107.95,62.87 107.95,47.62 U9.1
N05720: length 36.6
  BOTTOM w0.3: VR1.2 32.4,20.32 28.56,16.48 28.56,14 29.86,12.7 R1.2 52.07,12.7 53.98,14.61 U1.7
N05724: length 37
  BOTTOM w0.3: 38.73,17.14 42.16,17.14 42.7,16.61 49,16.61 52.07,19.68 53.98,19.68 ; 38.73,17.14 41.91,20.32 C1.1 ; 38.73,17.14 32.38,17.14 VR1.1 ; 53.98,19.68 U1.2 ; 53.98,19.68 53.98,19.05 55.24,17.78 U1.6
N05765: length 5.3
  BOTTOM w0.3: U1.5 56.52,14.61 58.42,12.7 C2.1
N05780: length 98.5
  BOTTOM w0.3: U9.3 117.47,47.45 115.11,45.09 71.12,45.09 65.41,39.37 v1(41.91,39.37) ; U8.13 22.2,54 23.64,52.56 23.64,51.43 24.65,50.42 26.37,50.42 26.6,50.18 26.6,49.55 29.21,46.95 v1(29.21,39.37)
N05813: length 16.1
  BOTTOM w0.3: C3.2 21.59,33.02 R18.1 19.05,41.91 U8.9
N09092: length 17.7
  BOTTOM w0.3: Q1.3 135.89,40.64 R22.1
N09137: length 30.8
  BOTTOM w0.3: C5.1 74.3,14.61 74.3,22.23 U10.3 69.85,25.4 68.68,26.57 60.86,26.57 R19.2
N09147: length 17.5
  BOTTOM w0.3: R20.2 C5.2 72.29,11.33 72.29,16.61 U10.6 U10.5
N09232: length 13.5
  BOTTOM w0.3: R19.1 62.23,33.02 C4.1 67.31,30.48 U10.1
N09296: length 62.6
  BOTTOM w0.3: U11.14 93.34,25.4 92.18,26.57 88.42,26.57 79.91,18.05 79.91,17.3 79.22,16.61 78.47,16.61 77.57,15.72 77.57,12.98 79.91,10.64 79.91,9.68 79.22,8.99 78.26,8.99 73.66,13.59 73.66,20.32 U10.4 67.31,22.86 C4.2 R20.1
N09410: length 14.5
  BOTTOM w0.3: U10.8 85.45,21.95 85.45,22.12 88.1,24.78 88.28,24.78 U11.3
N09434: length 33.8
  BOTTOM w0.3: U12.15 110.49,24.13 110.49,13.79 107.48,10.78 103.52,10.78 U11.11
N09465: length 44.2
  BOTTOM w0.3: U11.5 92.08,17.14 92.08,15.5 97.9,9.67 107.94,9.67 111.83,13.56 111.83,19.5 113.82,21.49 114.58,21.49 115.47,22.38 115.47,24.23 U12.14
N09487: length 28.6
  BOTTOM w0.3: U11.10 101.53,10.23 107.71,10.23 111.27,13.79 111.27,19.83 U12.13
N09499: length 54.1
  BOTTOM w0.3: U10.13 79.91,29.11 81.28,29.11 ; 81.28,29.11 81.28,35.56 R21.2 ; 81.28,29.11 91.54,29.11 94.08,26.57 97,26.57 97.69,25.88 97.69,25.12 106.2,16.61 107.16,16.61 107.85,17.3 107.85,24.23 U12.3
N09532: length 6
  BOTTOM w0.3: U10.12 77.57,24.23 77.57,21.49 U10.10
N09550: length 74.1
  BOTTOM w0.3: R22.2 79.63,40.64 77.57,38.58 77.57,37.62 79.93,35.26 79.93,30.02 79.22,29.31 78.47,29.31 77.02,27.87 77.02,19.5 U10.9 79.91,18.95 79.91,21.69 U10.11
N09947: length 15.7
  BOTTOM w0.3: U9.4 121.18,46.46 125.58,46.46 126.26,47.14 126.26,52.7 127.64,54.08 127.64,55.24
N09972: length 37.3
  BOTTOM w0.3: U13.9 124.46,38.1 130.11,43.75 130.11,56.27 128.66,57.72 125.03,57.72 122.56,55.24

## Copper pours and planes (outline as drawn; the poured copper is in the pictures)
GND on BOTTOM (solid shape): outline of 2792 points within 0,0 160,100
(no net) on BOTTOM: 0,0 0,100 160,100 160,0 ; 102 cut-outs

## Text on the board
Ref Des/Silkscreen Bottom: KJY
DEVICE_TYPE_BOTTOM: FIGURE | SIZE | 0.635 | 0.914 | 3.0 | DRILL CHART: TOP to BOTTOM | ALL UNITS ARE IN MILLIMETERS | PLATED | NON-PLATED | QTY | 3 | 278 | 4
